# Altium PCB panel_led.PcbDoc (part 2 of 2)
Units mm, origin at the board's own origin, x right, y up, seen from the top; angles counter-clockwise.
Board outline 185.25 x 285.25 mm, 2 copper layers (Top Layer, Bottom Layer); 460 components, 231 nets, 1602 pads, 0 vias.
Unrouted connection lines stored in the file: 3.
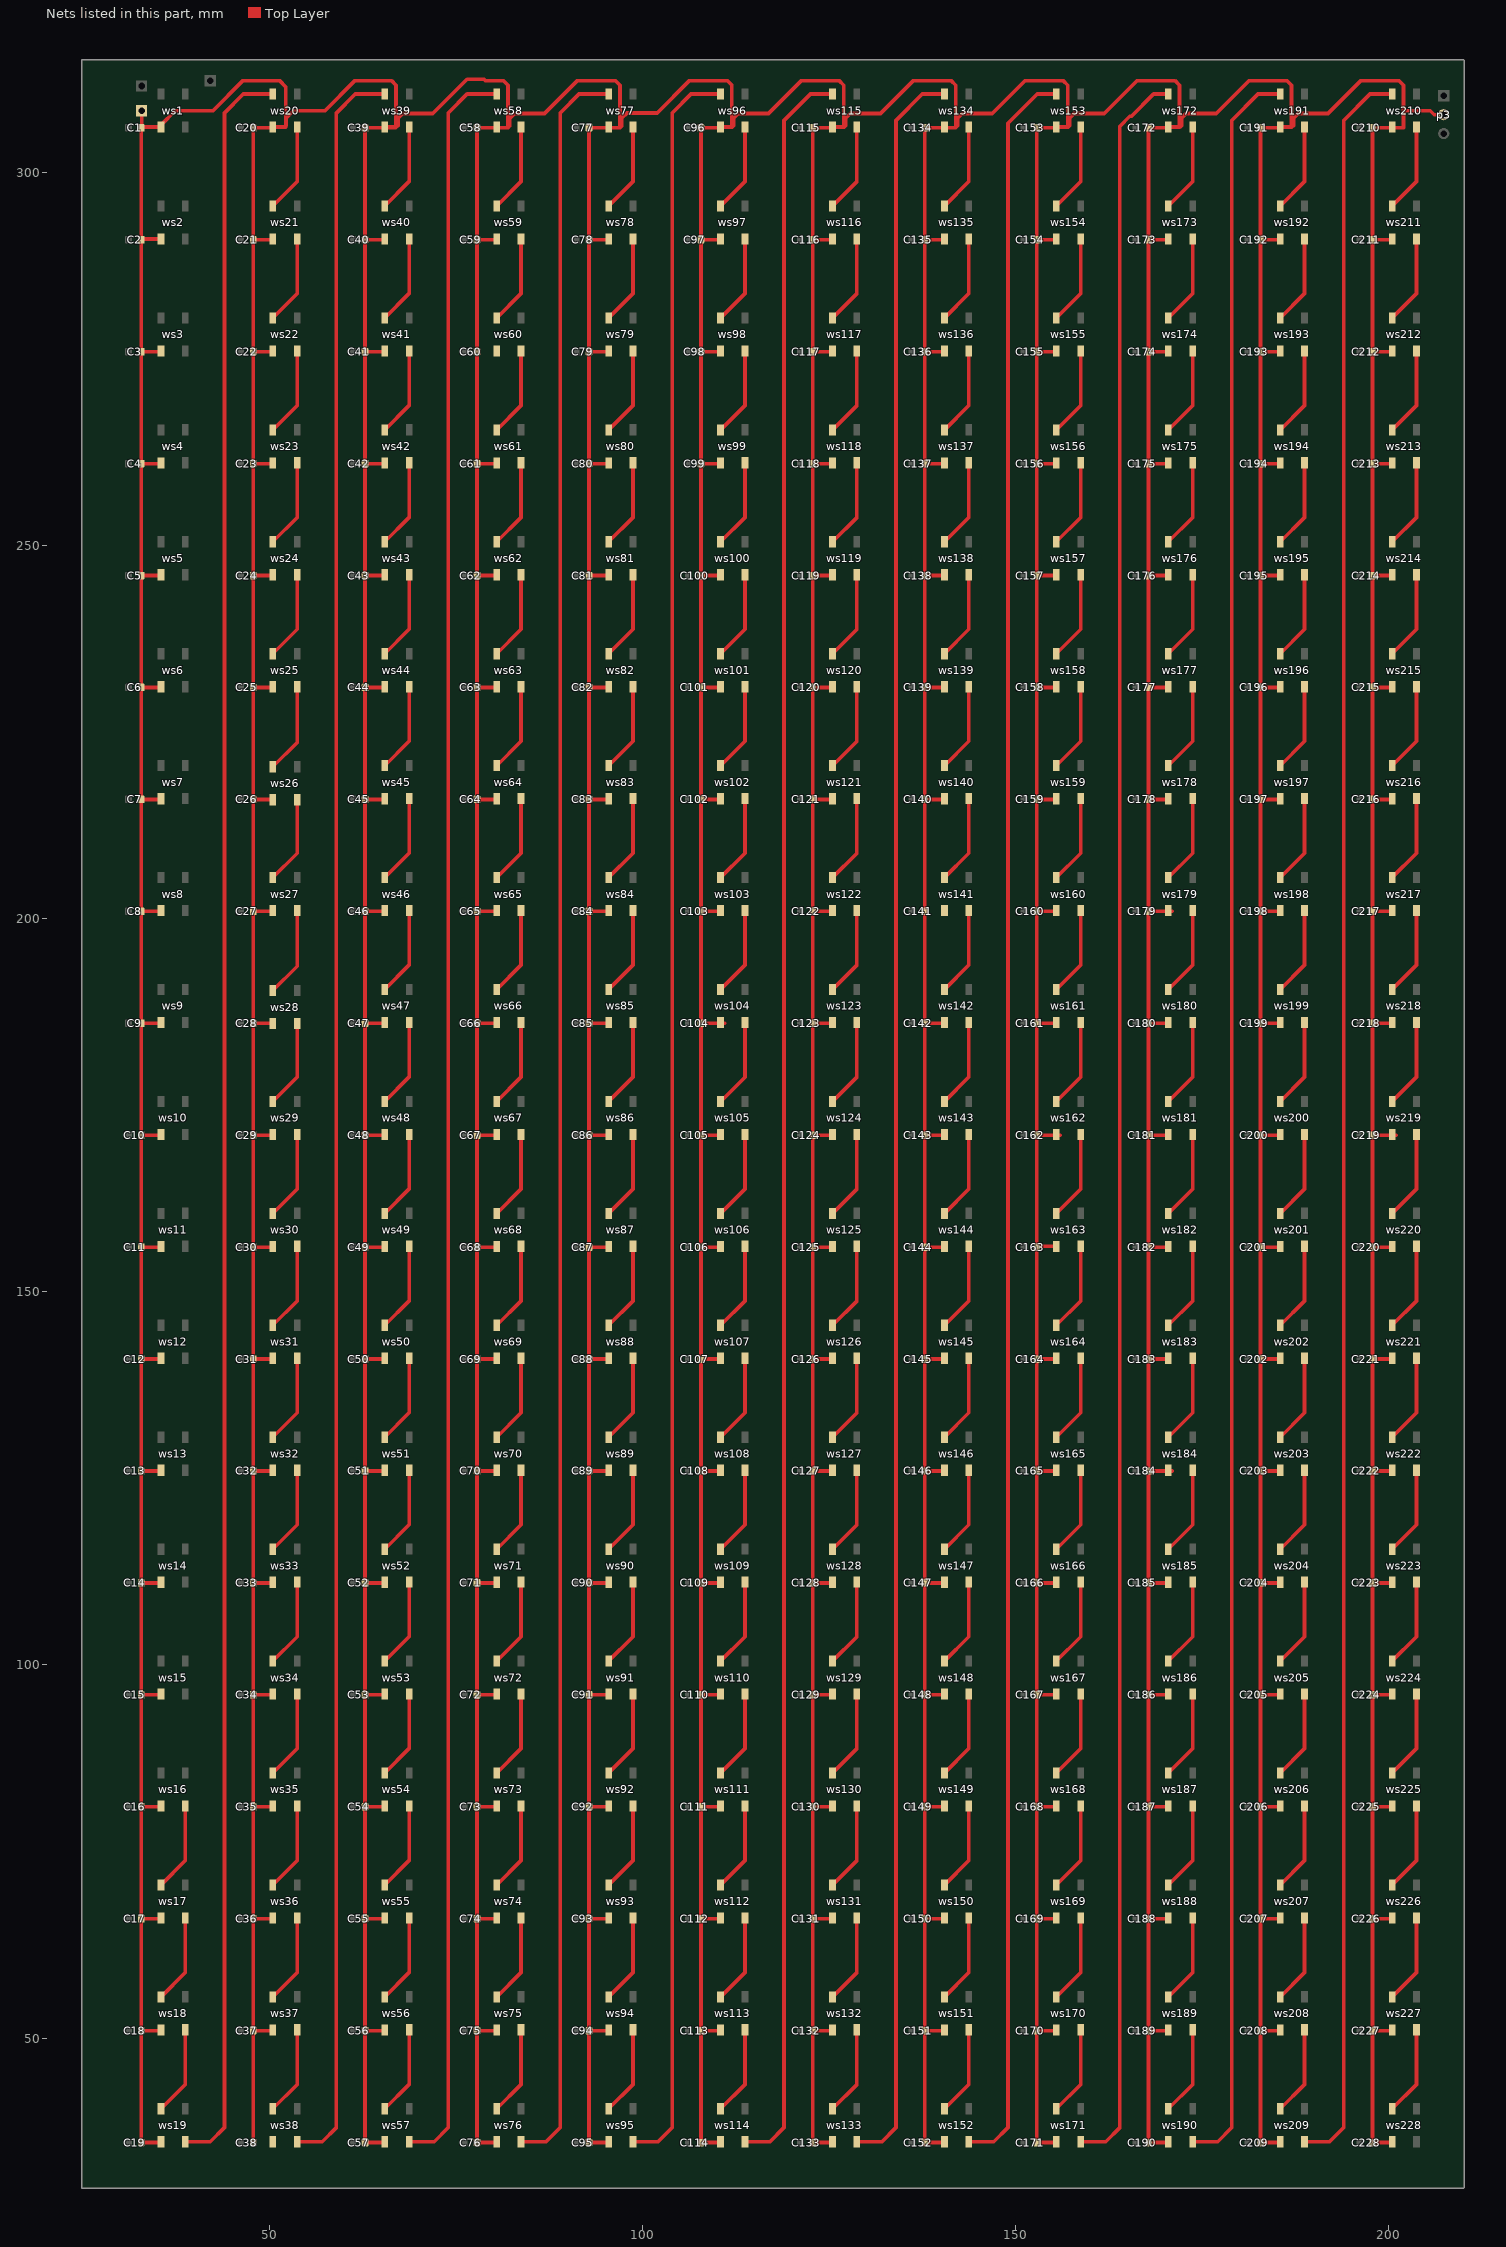
[diagram p2: the nets of this part, all layers, seen from the top]

## Nets (pads, with @x,y where several pads share a name; then routed paths per layer and width w, separated by ;. In a path a pad name is that pad's centre, name@x,y a point inside that pad or via, vN(x,y) a via of type N, cw(c..) or ccw(c..) an arc to the next point about the centre after c; other vN are vias at no path point) (continued)
Netws16_2: ws16.2 ws17.4 | length 11.9
  Top Layer w0.5: ws17.4@35.484,70.524 38.751,73.791 ws16.2@38.751,81.106
Netws17_2: ws17.2 ws18.4 | length 11.9
  Top Layer w0.5: ws18.4@35.484,55.524 38.751,58.791 ws17.2@38.751,66.106
Netws18_2: ws18.2 ws19.4 | length 11.9
  Top Layer w0.5: ws19.4@35.484,40.524 38.751,43.791 ws18.2@38.751,51.106
Netws19_2: ws19.2 ws20.4 | length 283.6
  Top Layer w0.5: ws19.2@38.751,36.106 42.106,36.106 44,38 44,308 46.524,310.524 ws20.4@50.484,310.524
Netws20_2: ws20.2 ws21.4 | length 11.9
  Top Layer w0.5: ws21.4@50.484,295.524 53.751,298.791 ws20.2@53.751,306.106
Netws21_2: ws21.2 ws22.4 | length 11.9
  Top Layer w0.5: ws22.4@50.484,280.524 53.751,283.791 ws21.2@53.751,291.106
Netws22_2: ws22.2 ws23.4 | length 11.9
  Top Layer w0.5: ws23.4@50.484,265.524 53.751,268.791 ws22.2@53.751,276.106
Netws23_2: ws23.2 ws24.4 | length 11.9
  Top Layer w0.5: ws24.4@50.484,250.524 53.751,253.791 ws23.2@53.751,261.106
Netws24_2: ws24.2 ws25.4 | length 11.9
  Top Layer w0.5: ws25.4@50.484,235.524 53.751,238.791 ws24.2@53.751,246.106
Netws25_2: ws25.2 ws26.4 | length 12.1
  Top Layer w0.5: ws26.4@50.484,220.374 53.751,223.641 ws25.2@53.751,231.106
Netws26_2: ws26.2 ws27.4 | length 11.8
  Top Layer w0.5: ws27.4@50.484,205.524 53.751,208.791 ws26.2@53.751,215.956
Netws27_2: ws27.2 ws28.4 | length 12.1
  Top Layer w0.5: ws28.4@50.484,190.374 53.751,193.641 ws27.2@53.751,201.106
Netws28_2: ws28.2 ws29.4 | length 11.8
  Top Layer w0.5: ws29.4@50.484,175.524 53.751,178.791 ws28.2@53.751,185.956
Netws29_2: ws29.2 ws30.4 | length 11.9
  Top Layer w0.5: ws30.4@50.484,160.524 53.751,163.791 ws29.2@53.751,171.106
Netws30_2: ws30.2 ws31.4 | length 11.9
  Top Layer w0.5: ws31.4@50.484,145.524 53.751,148.791 ws30.2@53.751,156.106
Netws31_2: ws31.2 ws32.4 | length 11.9
  Top Layer w0.5: ws32.4@50.484,130.524 53.751,133.791 ws31.2@53.751,141.106
Netws32_2: ws32.2 ws33.4 | length 11.9
  Top Layer w0.5: ws33.4@50.484,115.524 53.751,118.791 ws32.2@53.751,126.106
Netws33_2: ws33.2 ws34.4 | length 11.9
  Top Layer w0.5: ws34.4@50.484,100.524 53.751,103.791 ws33.2@53.751,111.106
Netws34_2: ws34.2 ws35.4 | length 11.9
  Top Layer w0.5: ws35.4@50.484,85.524 53.751,88.791 ws34.2@53.751,96.106
Netws35_2: ws35.2 ws36.4 | length 11.9
  Top Layer w0.5: ws36.4@50.484,70.524 53.751,73.791 ws35.2@53.751,81.106
Netws36_2: ws36.2 ws37.4 | length 11.9
  Top Layer w0.5: ws37.4@50.484,55.524 53.751,58.791 ws36.2@53.751,66.106
Netws37_2: ws37.2 ws38.4 | length 11.9
  Top Layer w0.5: ws38.4@50.484,40.524 53.751,43.791 ws37.2@53.751,51.106
Netws38_2: ws38.2 ws39.4 | length 283.6
  Top Layer w0.5: ws38.2@53.751,36.106 57.106,36.106 59,38 59,308 61.524,310.524 ws39.4@65.484,310.524
Netws39_2: ws39.2 ws40.4 | length 11.9
  Top Layer w0.5: ws40.4@65.484,295.524 68.751,298.791 ws39.2@68.751,306.106
Netws40_2: ws40.2 ws41.4 | length 11.9
  Top Layer w0.5: ws41.4@65.484,280.524 68.751,283.791 ws40.2@68.751,291.106
Netws41_2: ws41.2 ws42.4 | length 11.9
  Top Layer w0.5: ws42.4@65.484,265.524 68.751,268.791 ws41.2@68.751,276.106
Netws42_2: ws42.2 ws43.4 | length 11.9
  Top Layer w0.5: ws43.4@65.484,250.524 68.751,253.791 ws42.2@68.751,261.106
Netws43_2: ws43.2 ws44.4 | length 11.9
  Top Layer w0.5: ws44.4@65.484,235.524 68.751,238.791 ws43.2@68.751,246.106
Netws44_2: ws44.2 ws45.4 | length 11.9
  Top Layer w0.5: ws45.4@65.484,220.524 68.751,223.791 ws44.2@68.751,231.106
Netws45_2: ws45.2 ws46.4 | length 11.9
  Top Layer w0.5: ws46.4@65.484,205.524 68.751,208.791 ws45.2@68.751,216.106
Netws46_2: ws46.2 ws47.4 | length 11.9
  Top Layer w0.5: ws47.4@65.484,190.524 68.751,193.791 ws46.2@68.751,201.106
Netws47_2: ws47.2 ws48.4 | length 11.9
  Top Layer w0.5: ws48.4@65.484,175.524 68.751,178.791 ws47.2@68.751,186.106
Netws48_2: ws48.2 ws49.4 | length 11.9
  Top Layer w0.5: ws49.4@65.484,160.524 68.751,163.791 ws48.2@68.751,171.106
Netws49_2: ws49.2 ws50.4 | length 11.9
  Top Layer w0.5: ws50.4@65.484,145.524 68.751,148.791 ws49.2@68.751,156.106
Netws50_2: ws50.2 ws51.4 | length 11.9
  Top Layer w0.5: ws51.4@65.484,130.524 68.751,133.791 ws50.2@68.751,141.106
Netws51_2: ws51.2 ws52.4 | length 11.9
  Top Layer w0.5: ws52.4@65.484,115.524 68.751,118.791 ws51.2@68.751,126.106
Netws52_2: ws52.2 ws53.4 | length 11.9
  Top Layer w0.5: ws53.4@65.484,100.524 68.751,103.791 ws52.2@68.751,111.106
Netws53_2: ws53.2 ws54.4 | length 11.9
  Top Layer w0.5: ws54.4@65.484,85.524 68.751,88.791 ws53.2@68.751,96.106
Netws54_2: ws54.2 ws55.4 | length 11.9
  Top Layer w0.5: ws55.4@65.484,70.524 68.751,73.791 ws54.2@68.751,81.106
Netws55_2: ws55.2 ws56.4 | length 11.9
  Top Layer w0.5: ws56.4@65.484,55.524 68.751,58.791 ws55.2@68.751,66.106
Netws56_2: ws56.2 ws57.4 | length 11.9
  Top Layer w0.5: ws57.4@65.484,40.524 68.751,43.791 ws56.2@68.751,51.106
Netws57_2: ws57.2 ws58.4 | length 283.6
  Top Layer w0.5: ws57.2@68.751,36.106 72.106,36.106 74,38 74,308 76.524,310.524 ws58.4@80.484,310.524
Netws58_2: ws58.2 ws59.4 | length 11.9
  Top Layer w0.5: ws59.4@80.484,295.524 83.751,298.791 ws58.2@83.751,306.106
Netws59_2: ws59.2 ws60.4 | length 11.9
  Top Layer w0.5: ws60.4@80.484,280.524 83.751,283.791 ws59.2@83.751,291.106
Netws60_2: ws60.2 ws61.4 | length 11.9
  Top Layer w0.5: ws61.4@80.484,265.524 83.751,268.791 ws60.2@83.751,276.106
Netws61_2: ws61.2 ws62.4 | length 11.9
  Top Layer w0.5: ws62.4@80.484,250.524 83.751,253.791 ws61.2@83.751,261.106
Netws62_2: ws62.2 ws63.4 | length 11.9
  Top Layer w0.5: ws63.4@80.484,235.524 83.751,238.791 ws62.2@83.751,246.106
Netws63_2: ws63.2 ws64.4 | length 11.9
  Top Layer w0.5: ws64.4@80.484,220.524 83.751,223.791 ws63.2@83.751,231.106
Netws64_2: ws64.2 ws65.4 | length 11.9
  Top Layer w0.5: ws65.4@80.484,205.524 83.751,208.791 ws64.2@83.751,216.106
Netws65_2: ws65.2 ws66.4 | length 11.9
  Top Layer w0.5: ws66.4@80.484,190.524 83.751,193.791 ws65.2@83.751,201.106
Netws66_2: ws66.2 ws67.4 | length 11.9
  Top Layer w0.5: ws67.4@80.484,175.524 83.751,178.791 ws66.2@83.751,186.106
Netws67_2: ws67.2 ws68.4 | length 11.9
  Top Layer w0.5: ws68.4@80.484,160.524 83.751,163.791 ws67.2@83.751,171.106
Netws68_2: ws68.2 ws69.4 | length 11.9
  Top Layer w0.5: ws69.4@80.484,145.524 83.751,148.791 ws68.2@83.751,156.106
Netws69_2: ws69.2 ws70.4 | length 11.9
  Top Layer w0.5: ws70.4@80.484,130.524 83.751,133.791 ws69.2@83.751,141.106
Netws70_2: ws70.2 ws71.4 | length 11.9
  Top Layer w0.5: ws71.4@80.484,115.524 83.751,118.791 ws70.2@83.751,126.106
Netws71_2: ws71.2 ws72.4 | length 11.9
  Top Layer w0.5: ws72.4@80.484,100.524 83.751,103.791 ws71.2@83.751,111.106
Netws72_2: ws72.2 ws73.4 | length 11.9
  Top Layer w0.5: ws73.4@80.484,85.524 83.751,88.791 ws72.2@83.751,96.106
Netws73_2: ws73.2 ws74.4 | length 11.9
  Top Layer w0.5: ws74.4@80.484,70.524 83.751,73.791 ws73.2@83.751,81.106
Netws74_2: ws74.2 ws75.4 | length 11.9
  Top Layer w0.5: ws75.4@80.484,55.524 83.751,58.791 ws74.2@83.751,66.106
Netws75_2: ws75.2 ws76.4 | length 11.9
  Top Layer w0.5: ws76.4@80.484,40.524 83.751,43.791 ws75.2@83.751,51.106
Netws76_2: ws76.2 ws77.4 | length 283.6
  Top Layer w0.5: ws76.2@83.751,36.106 87.106,36.106 89,38 89,308 91.524,310.524 ws77.4@95.484,310.524
Netws77_2: ws77.2 ws78.4 | length 11.9
  Top Layer w0.5: ws78.4@95.484,295.524 98.751,298.791 ws77.2@98.751,306.106
Netws78_2: ws78.2 ws79.4 | length 11.9
  Top Layer w0.5: ws79.4@95.484,280.524 98.751,283.791 ws78.2@98.751,291.106
Netws79_2: ws79.2 ws80.4 | length 11.9
  Top Layer w0.5: ws80.4@95.484,265.524 98.751,268.791 ws79.2@98.751,276.106
Netws80_2: ws80.2 ws81.4 | length 11.9
  Top Layer w0.5: ws81.4@95.484,250.524 98.751,253.791 ws80.2@98.751,261.106
Netws81_2: ws81.2 ws82.4 | length 11.9
  Top Layer w0.5: ws82.4@95.484,235.524 98.751,238.791 ws81.2@98.751,246.106
Netws82_2: ws82.2 ws83.4 | length 11.9
  Top Layer w0.5: ws83.4@95.484,220.524 98.751,223.791 ws82.2@98.751,231.106
Netws83_2: ws83.2 ws84.4 | length 11.9
  Top Layer w0.5: ws84.4@95.484,205.524 98.751,208.791 ws83.2@98.751,216.106
Netws84_2: ws84.2 ws85.4 | length 11.9
  Top Layer w0.5: ws85.4@95.484,190.524 98.751,193.791 ws84.2@98.751,201.106
Netws85_2: ws85.2 ws86.4 | length 11.9
  Top Layer w0.5: ws86.4@95.484,175.524 98.751,178.791 ws85.2@98.751,186.106
Netws86_2: ws86.2 ws87.4 | length 11.9
  Top Layer w0.5: ws87.4@95.484,160.524 98.751,163.791 ws86.2@98.751,171.106
Netws87_2: ws87.2 ws88.4 | length 11.9
  Top Layer w0.5: ws88.4@95.484,145.524 98.751,148.791 ws87.2@98.751,156.106
Netws88_2: ws88.2 ws89.4 | length 11.9
  Top Layer w0.5: ws89.4@95.484,130.524 98.751,133.791 ws88.2@98.751,141.106
Netws89_2: ws89.2 ws90.4 | length 11.9
  Top Layer w0.5: ws90.4@95.484,115.524 98.751,118.791 ws89.2@98.751,126.106
Netws90_2: ws90.2 ws91.4 | length 11.9
  Top Layer w0.5: ws91.4@95.484,100.524 98.751,103.791 ws90.2@98.751,111.106
Netws91_2: ws91.2 ws92.4 | length 11.9
  Top Layer w0.5: ws92.4@95.484,85.524 98.751,88.791 ws91.2@98.751,96.106
Netws92_2: ws92.2 ws93.4 | length 11.9
  Top Layer w0.5: ws93.4@95.484,70.524 98.751,73.791 ws92.2@98.751,81.106
Netws93_2: ws93.2 ws94.4 | length 11.9
  Top Layer w0.5: ws94.4@95.484,55.524 98.751,58.791 ws93.2@98.751,66.106
Netws94_2: ws94.2 ws95.4 | length 11.9
  Top Layer w0.5: ws95.4@95.484,40.524 98.751,43.791 ws94.2@98.751,51.106
Netws95_2: ws95.2 ws96.4 | length 283.6
  Top Layer w0.5: ws95.2@98.751,36.106 102.106,36.106 104,38 104,308 106.524,310.524 ws96.4@110.484,310.524
Netws96_2: ws96.2 ws97.4 | length 11.9
  Top Layer w0.5: ws97.4@110.484,295.524 113.751,298.791 ws96.2@113.751,306.106
Netws97_2: ws97.2 ws98.4 | length 11.9
  Top Layer w0.5: ws98.4@110.484,280.524 113.751,283.791 ws97.2@113.751,291.106
Netws98_2: ws98.2 ws99.4 | length 11.9
  Top Layer w0.5: ws99.4@110.484,265.524 113.751,268.791 ws98.2@113.751,276.106
Netws99_2: ws99.2 ws100.4 | length 11.9
  Top Layer w0.5: ws100.4@110.484,250.524 113.751,253.791 ws99.2@113.751,261.106
Netws100_2: ws100.2 ws101.4 | length 11.9
  Top Layer w0.5: ws101.4@110.484,235.524 113.751,238.791 ws100.2@113.751,246.106
Netws101_2: ws101.2 ws102.4 | length 11.9
  Top Layer w0.5: ws102.4@110.484,220.524 113.751,223.791 ws101.2@113.751,231.106
Netws102_2: ws102.2 ws103.4 | length 11.9
  Top Layer w0.5: ws103.4@110.484,205.524 113.751,208.791 ws102.2@113.751,216.106
Netws103_2: ws103.2 ws104.4 | length 11.9
  Top Layer w0.5: ws104.4@110.484,190.524 113.751,193.791 ws103.2@113.751,201.106
Netws104_2: ws104.2 ws105.4 | length 11.9
  Top Layer w0.5: ws105.4@110.524,175.524 113.751,178.751 ws104.2@113.751,186.106
Netws105_2: ws105.2 ws106.4 | length 11.9
  Top Layer w0.5: ws106.4@110.484,160.524 113.751,163.791 ws105.2@113.751,171.106
Netws106_2: ws106.2 ws107.4 | length 11.9
  Top Layer w0.5: ws107.4@110.484,145.524 113.751,148.791 ws106.2@113.751,156.106
Netws107_2: ws107.2 ws108.4 | length 11.9
  Top Layer w0.5: ws108.4@110.484,130.524 113.751,133.791 ws107.2@113.751,141.106
Netws108_2: ws108.2 ws109.4 | length 11.9
  Top Layer w0.5: ws109.4@110.484,115.524 113.751,118.791 ws108.2@113.751,126.106
Netws109_2: ws109.2 ws110.4 | length 11.9
  Top Layer w0.5: ws110.4@110.484,100.524 113.751,103.791 ws109.2@113.751,111.106
Netws110_2: ws110.2 ws111.4 | length 11.9
  Top Layer w0.5: ws111.4@110.484,85.524 113.751,88.791 ws110.2@113.751,96.106
Netws111_2: ws111.2 ws112.4 | length 11.9
  Top Layer w0.5: ws112.4@110.484,70.524 113.751,73.791 ws111.2@113.751,81.106
Netws112_2: ws112.2 ws113.4 | length 11.9
  Top Layer w0.5: ws113.4@110.484,55.524 113.751,58.791 ws112.2@113.751,66.106
Netws113_2: ws113.2 ws114.4 | length 11.9
  Top Layer w0.5: ws114.4@110.484,40.524 113.751,43.791 ws113.2@113.751,51.106
Netws114_2: ws114.2 ws115.4 | length 283
  Top Layer w0.5: ws114.2@113.751,36.106 117.106,36.106 119,38 119,307 122.524,310.524 ws115.4@125.484,310.524
Netws115_2: ws115.2 ws116.4 | length 11.9
  Top Layer w0.5: ws116.4@125.484,295.524 128.751,298.791 ws115.2@128.751,306.106
Netws116_2: ws116.2 ws117.4 | length 11.9
  Top Layer w0.5: ws117.4@125.484,280.524 128.751,283.791 ws116.2@128.751,291.106
Netws117_2: ws117.2 ws118.4 | length 11.9
  Top Layer w0.5: ws118.4@125.484,265.524 128.751,268.791 ws117.2@128.751,276.106
Netws118_2: ws118.2 ws119.4 | length 11.9
  Top Layer w0.5: ws119.4@125.484,250.524 128.751,253.791 ws118.2@128.751,261.106
Netws119_2: ws119.2 ws120.4 | length 11.9
  Top Layer w0.5: ws120.4@125.484,235.524 128.751,238.791 ws119.2@128.751,246.106
Netws120_2: ws120.2 ws121.4 | length 11.9
  Top Layer w0.5: ws121.4@125.484,220.524 128.751,223.791 ws120.2@128.751,231.106
Netws121_2: ws121.2 ws122.4 | length 11.9
  Top Layer w0.5: ws122.4@125.484,205.524 128.751,208.791 ws121.2@128.751,216.106
Netws122_2: ws122.2 ws123.4 | length 11.9
  Top Layer w0.5: ws123.4@125.484,190.524 128.751,193.791 ws122.2@128.751,201.106
Netws123_2: ws123.2 ws124.4 | length 11.9
  Top Layer w0.5: ws124.4@125.484,175.524 128.751,178.791 ws123.2@128.751,186.106
Netws124_2: ws124.2 ws125.4 | length 11.9
  Top Layer w0.5: ws125.4@125.484,160.524 128.751,163.791 ws124.2@128.751,171.106
Netws125_2: ws125.2 ws126.4 | length 11.9
  Top Layer w0.5: ws126.4@125.484,145.524 128.751,148.791 ws125.2@128.751,156.106
Netws126_2: ws126.2 ws127.4 | length 11.9
  Top Layer w0.5: ws127.4@125.484,130.524 128.751,133.791 ws126.2@128.751,141.106
Netws127_2: ws127.2 ws128.4 | length 11.9
  Top Layer w0.5: ws128.4@125.484,115.524 128.751,118.791 ws127.2@128.751,126.106
Netws128_2: ws128.2 ws129.4 | length 11.9
  Top Layer w0.5: ws129.4@125.484,100.524 128.751,103.791 ws128.2@128.751,111.106
Netws129_2: ws129.2 ws130.4 | length 11.9
  Top Layer w0.5: ws130.4@125.484,85.524 128.751,88.791 ws129.2@128.751,96.106
Netws130_2: ws130.2 ws131.4 | length 11.9
  Top Layer w0.5: ws131.4@125.484,70.524 128.751,73.791 ws130.2@128.751,81.106
Netws131_2: ws131.2 ws132.4 | length 11.9
  Top Layer w0.5: ws132.4@125.484,55.524 128.751,58.791 ws131.2@128.751,66.106
Netws132_2: ws132.2 ws133.4 | length 11.9
  Top Layer w0.5: ws133.4@125.484,40.524 128.751,43.791 ws132.2@128.751,51.106
Netws133_2: ws133.2 ws134.4 | length 283
  Top Layer w0.5: ws133.2@128.751,36.106 132.106,36.106 134,38 134,307 137.524,310.524 ws134.4@140.484,310.524
Netws134_2: ws134.2 ws135.4 | length 11.9
  Top Layer w0.5: ws135.4@140.484,295.524 143.751,298.791 ws134.2@143.751,306.106
Netws135_2: ws135.2 ws136.4 | length 11.9
  Top Layer w0.5: ws136.4@140.484,280.524 143.751,283.791 ws135.2@143.751,291.106
Netws136_2: ws136.2 ws137.4 | length 11.9
  Top Layer w0.5: ws137.4@140.484,265.524 143.751,268.791 ws136.2@143.751,276.106
Netws137_2: ws137.2 ws138.4 | length 11.9
  Top Layer w0.5: ws138.4@140.484,250.524 143.751,253.791 ws137.2@143.751,261.106
Netws138_2: ws138.2 ws139.4 | length 11.9
  Top Layer w0.5: ws139.4@140.484,235.524 143.751,238.791 ws138.2@143.751,246.106
Netws139_2: ws139.2 ws140.4 | length 11.9
  Top Layer w0.5: ws140.4@140.484,220.524 143.751,223.791 ws139.2@143.751,231.106
Netws140_2: ws140.2 ws141.4 | length 11.9
  Top Layer w0.5: ws141.4@140.484,205.524 143.751,208.791 ws140.2@143.751,216.106
Netws141_2: ws141.2 ws142.4 | length 11.9
  Top Layer w0.5: ws142.4@140.484,190.524 143.751,193.791 ws141.2@143.751,201.106
Netws142_2: ws142.2 ws143.4 | length 11.9
  Top Layer w0.5: ws143.4@140.484,175.524 143.751,178.791 ws142.2@143.751,186.106
Netws143_2: ws143.2 ws144.4 | length 11.9
  Top Layer w0.5: ws144.4@140.484,160.524 143.751,163.791 ws143.2@143.751,171.106
Netws144_2: ws144.2 ws145.4 | length 11.9
  Top Layer w0.5: ws145.4@140.484,145.524 143.751,148.791 ws144.2@143.751,156.106
Netws145_2: ws145.2 ws146.4 | length 11.9
  Top Layer w0.5: ws146.4@140.484,130.524 143.751,133.791 ws145.2@143.751,141.106
Netws146_2: ws146.2 ws147.4 | length 11.9
  Top Layer w0.5: ws147.4@140.484,115.524 143.751,118.791 ws146.2@143.751,126.106
Netws147_2: ws147.2 ws148.4 | length 11.9
  Top Layer w0.5: ws148.4@140.484,100.524 143.751,103.791 ws147.2@143.751,111.106
Netws148_2: ws148.2 ws149.4 | length 11.9
  Top Layer w0.5: ws149.4@140.484,85.524 143.751,88.791 ws148.2@143.751,96.106
Netws149_2: ws149.2 ws150.4 | length 11.9
  Top Layer w0.5: ws150.4@140.484,70.524 143.751,73.791 ws149.2@143.751,81.106
Netws150_2: ws150.2 ws151.4 | length 11.9
  Top Layer w0.5: ws151.4@140.484,55.524 143.751,58.791 ws150.2@143.751,66.106
Netws151_2: ws151.2 ws152.4 | length 11.9
  Top Layer w0.5: ws152.4@140.484,40.524 143.751,43.791 ws151.2@143.751,51.106
Netws152_2: ws152.2 ws153.4 | length 282.7
  Top Layer w0.5: ws152.2@143.751,36.106 147.106,36.106 149,38 149,306.606 152.917,310.524 ws153.4@155.484,310.524
Netws153_2: ws153.2 ws154.4 | length 11.9
  Top Layer w0.5: ws154.4@155.484,295.524 158.751,298.791 ws153.2@158.751,306.106
Netws154_2: ws154.2 ws155.4 | length 11.9
  Top Layer w0.5: ws155.4@155.484,280.524 158.751,283.791 ws154.2@158.751,291.106
Netws155_2: ws155.2 ws156.4 | length 11.9
  Top Layer w0.5: ws156.4@155.484,265.524 158.751,268.791 ws155.2@158.751,276.106
Netws156_2: ws156.2 ws157.4 | length 11.9
  Top Layer w0.5: ws157.4@155.484,250.524 158.751,253.791 ws156.2@158.751,261.106
Netws157_2: ws157.2 ws158.4 | length 11.9
  Top Layer w0.5: ws158.4@155.484,235.524 158.751,238.791 ws157.2@158.751,246.106
Netws158_2: ws158.2 ws159.4 | length 11.9
  Top Layer w0.5: ws159.4@155.484,220.524 158.751,223.791 ws158.2@158.751,231.106
Netws159_2: ws159.2 ws160.4 | length 11.9
  Top Layer w0.5: ws160.4@155.484,205.524 158.751,208.791 ws159.2@158.751,216.106
Netws160_2: ws160.2 ws161.4 | length 11.9
  Top Layer w0.5: ws161.4@155.484,190.524 158.751,193.791 ws160.2@158.751,201.106
Netws161_2: ws161.2 ws162.4 | length 11.9
  Top Layer w0.5: ws162.4@155.484,175.524 158.751,178.791 ws161.2@158.751,186.106
Netws162_2: ws162.2 ws163.4 | length 11.9
  Top Layer w0.5: ws163.4@155.484,160.524 158.751,163.791 ws162.2@158.751,171.106
Netws163_2: ws163.2 ws164.4 | length 11.9
  Top Layer w0.5: ws164.4@155.484,145.524 158.751,148.791 ws163.2@158.751,156.106
Netws164_2: ws164.2 ws165.4 | length 11.9
  Top Layer w0.5: ws165.4@155.484,130.524 158.751,133.791 ws164.2@158.751,141.106
Netws165_2: ws165.2 ws166.4 | length 11.9
  Top Layer w0.5: ws166.4@155.484,115.524 158.751,118.791 ws165.2@158.751,126.106
Netws166_2: ws166.2 ws167.4 | length 11.9
  Top Layer w0.5: ws167.4@155.484,100.524 158.751,103.791 ws166.2@158.751,111.106
Netws167_2: ws167.2 ws168.4 | length 11.9
  Top Layer w0.5: ws168.4@155.484,85.524 158.751,88.791 ws167.2@158.751,96.106
Netws168_2: ws168.2 ws169.4 | length 11.9
  Top Layer w0.5: ws169.4@155.484,70.524 158.751,73.791 ws168.2@158.751,81.106
Netws169_2: ws169.2 ws170.4 | length 11.9
  Top Layer w0.5: ws170.4@155.484,55.524 158.751,58.791 ws169.2@158.751,66.106
Netws170_2: ws170.2 ws171.4 | length 11.9
  Top Layer w0.5: ws171.4@155.484,40.524 158.751,43.791 ws170.2@158.751,51.106
Netws171_2: ws171.2 ws172.4 | length 282.5
  Top Layer w0.5: ws171.2@158.751,36.106 162.106,36.106 164,38 164,306.219 165.331,307.55 165.55,307.55 168.524,310.524 ws172.4@170.484,310.524
Netws172_2: ws172.2 ws173.4 | length 11.9
  Top Layer w0.5: ws173.4@170.484,295.524 173.751,298.791 ws172.2@173.751,306.106
Netws173_2: ws173.2 ws174.4 | length 11.9
  Top Layer w0.5: ws174.4@170.484,280.524 173.751,283.791 ws173.2@173.751,291.106
Netws174_2: ws174.2 ws175.4 | length 11.9
  Top Layer w0.5: ws175.4@170.484,265.524 173.751,268.791 ws174.2@173.751,276.106
Netws175_2: ws175.2 ws176.4 | length 11.9
  Top Layer w0.5: ws176.4@170.484,250.524 173.751,253.791 ws175.2@173.751,261.106
Netws176_2: ws176.2 ws177.4 | length 11.9
  Top Layer w0.5: ws177.4@170.484,235.524 173.751,238.791 ws176.2@173.751,246.106
Netws177_2: ws177.2 ws178.4 | length 11.9
  Top Layer w0.5: ws178.4@170.484,220.524 173.751,223.791 ws177.2@173.751,231.106
Netws178_2: ws178.2 ws179.4 | length 11.9
  Top Layer w0.5: ws179.4@170.484,205.524 173.751,208.791 ws178.2@173.751,216.106
Netws179_2: ws179.2 ws180.4 | length 11.9
  Top Layer w0.5: ws180.4@170.484,190.524 173.751,193.791 ws179.2@173.751,201.106
Netws180_2: ws180.2 ws181.4 | length 11.9
  Top Layer w0.5: ws181.4@170.484,175.524 173.751,178.791 ws180.2@173.751,186.106
Netws181_2: ws181.2 ws182.4 | length 11.9
  Top Layer w0.5: ws182.4@170.484,160.524 173.751,163.791 ws181.2@173.751,171.106
Netws182_2: ws182.2 ws183.4 | length 11.9
  Top Layer w0.5: ws183.4@170.484,145.524 173.751,148.791 ws182.2@173.751,156.106
Netws183_2: ws183.2 ws184.4 | length 11.9
  Top Layer w0.5: ws184.4@170.484,130.524 173.751,133.791 ws183.2@173.751,141.106
Netws184_2: ws184.2 ws185.4 | length 11.9
  Top Layer w0.5: ws185.4@170.484,115.524 173.751,118.791 ws184.2@173.751,126.106
Netws185_2: ws185.2 ws186.4 | length 11.9
  Top Layer w0.5: ws186.4@170.484,100.524 173.751,103.791 ws185.2@173.751,111.106
Netws186_2: ws186.2 ws187.4 | length 11.9
  Top Layer w0.5: ws187.4@170.484,85.524 173.751,88.791 ws186.2@173.751,96.106
Netws187_2: ws187.2 ws188.4 | length 11.9
  Top Layer w0.5: ws188.4@170.484,70.524 173.751,73.791 ws187.2@173.751,81.106
Netws188_2: ws188.2 ws189.4 | length 11.9
  Top Layer w0.5: ws189.4@170.484,55.524 173.751,58.791 ws188.2@173.751,66.106
Netws189_2: ws189.2 ws190.4 | length 11.9
  Top Layer w0.5: ws190.4@170.484,40.524 173.751,43.791 ws189.2@173.751,51.106
Netws190_2: ws190.2 ws191.4 | length 283
  Top Layer w0.5: ws190.2@173.751,36.106 177.106,36.106 179,38 179,307 182.524,310.524 ws191.4@185.484,310.524
Netws191_2: ws191.2 ws192.4 | length 11.9
  Top Layer w0.5: ws192.4@185.484,295.524 188.751,298.791 ws191.2@188.751,306.106
Netws192_2: ws192.2 ws193.4 | length 11.9
  Top Layer w0.5: ws193.4@185.484,280.524 188.751,283.791 ws192.2@188.751,291.106
Netws193_2: ws193.2 ws194.4 | length 11.9
  Top Layer w0.5: ws194.4@185.484,265.524 188.751,268.791 ws193.2@188.751,276.106
Netws194_2: ws194.2 ws195.4 | length 11.9
  Top Layer w0.5: ws195.4@185.484,250.524 188.751,253.791 ws194.2@188.751,261.106
Netws195_2: ws195.2 ws196.4 | length 11.9
  Top Layer w0.5: ws196.4@185.484,235.524 188.751,238.791 ws195.2@188.751,246.106
Netws196_2: ws196.2 ws197.4 | length 11.9
  Top Layer w0.5: ws197.4@185.484,220.524 188.751,223.791 ws196.2@188.751,231.106
Netws197_2: ws197.2 ws198.4 | length 11.9
  Top Layer w0.5: ws198.4@185.484,205.524 188.751,208.791 ws197.2@188.751,216.106
Netws198_2: ws198.2 ws199.4 | length 11.9
  Top Layer w0.5: ws199.4@185.484,190.524 188.751,193.791 ws198.2@188.751,201.106
Netws199_2: ws199.2 ws200.4 | length 11.9
  Top Layer w0.5: ws200.4@185.484,175.524 188.751,178.791 ws199.2@188.751,186.106
Netws200_2: ws200.2 ws201.4 | length 11.9
  Top Layer w0.5: ws201.4@185.484,160.524 188.751,163.791 ws200.2@188.751,171.106
Netws201_2: ws201.2 ws202.4 | length 11.9
  Top Layer w0.5: ws202.4@185.484,145.524 188.751,148.791 ws201.2@188.751,156.106
Netws202_2: ws202.2 ws203.4 | length 11.9
  Top Layer w0.5: ws203.4@185.484,130.524 188.751,133.791 ws202.2@188.751,141.106
Netws203_2: ws203.2 ws204.4 | length 11.9
  Top Layer w0.5: ws204.4@185.484,115.524 188.751,118.791 ws203.2@188.751,126.106
Netws204_2: ws204.2 ws205.4 | length 11.9
  Top Layer w0.5: ws205.4@185.484,100.524 188.751,103.791 ws204.2@188.751,111.106
Netws205_2: ws205.2 ws206.4 | length 11.9
  Top Layer w0.5: ws206.4@185.484,85.524 188.751,88.791 ws205.2@188.751,96.106
Netws206_2: ws206.2 ws207.4 | length 11.9
  Top Layer w0.5: ws207.4@185.484,70.524 188.751,73.791 ws206.2@188.751,81.106
Netws207_2: ws207.2 ws208.4 | length 11.9
  Top Layer w0.5: ws208.4@185.484,55.524 188.751,58.791 ws207.2@188.751,66.106
Netws208_2: ws208.2 ws209.4 | length 11.9
  Top Layer w0.5: ws209.4@185.484,40.524 188.751,43.791 ws208.2@188.751,51.106
Netws209_2: ws209.2 ws210.4 | length 283
  Top Layer w0.5: ws209.2@188.751,36.106 192.106,36.106 194,38 194,307 197.524,310.524 ws210.4@200.484,310.524
Netws210_2: ws210.2 ws211.4 | length 11.9
  Top Layer w0.5: ws211.4@200.484,295.524 203.751,298.791 ws210.2@203.751,306.106
Netws211_2: ws211.2 ws212.4 | length 11.9
  Top Layer w0.5: ws212.4@200.484,280.524 203.751,283.791 ws211.2@203.751,291.106
Netws212_2: ws212.2 ws213.4 | length 11.9
  Top Layer w0.5: ws213.4@200.484,265.524 203.751,268.791 ws212.2@203.751,276.106
Netws213_2: ws213.2 ws214.4 | length 11.9
  Top Layer w0.5: ws214.4@200.484,250.524 203.751,253.791 ws213.2@203.751,261.106
Netws214_2: ws214.2 ws215.4 | length 11.9
  Top Layer w0.5: ws215.4@200.484,235.524 203.751,238.791 ws214.2@203.751,246.106
Netws215_2: ws215.2 ws216.4 | length 11.9
  Top Layer w0.5: ws216.4@200.484,220.524 203.751,223.791 ws215.2@203.751,231.106
Netws216_2: ws216.2 ws217.4 | length 11.9
  Top Layer w0.5: ws217.4@200.484,205.524 203.751,208.791 ws216.2@203.751,216.106
Netws217_2: ws217.2 ws218.4 | length 11.9
  Top Layer w0.5: ws218.4@200.484,190.524 203.751,193.791 ws217.2@203.751,201.106
Netws218_2: ws218.2 ws219.4 | length 11.9
  Top Layer w0.5: ws219.4@200.484,175.524 203.751,178.791 ws218.2@203.751,186.106
Netws219_2: ws219.2 ws220.4 | length 11.9
  Top Layer w0.5: ws220.4@200.484,160.524 203.751,163.791 ws219.2@203.751,171.106
Netws220_2: ws220.2 ws221.4 | length 11.9
  Top Layer w0.5: ws221.4@200.484,145.524 203.751,148.791 ws220.2@203.751,156.106
Netws221_2: ws221.2 ws222.4 | length 11.9
  Top Layer w0.5: ws222.4@200.484,130.524 203.751,133.791 ws221.2@203.751,141.106
Netws222_2: ws222.2 ws223.4 | length 11.9
  Top Layer w0.5: ws223.4@200.484,115.524 203.751,118.791 ws222.2@203.751,126.106
Netws223_2: ws223.2 ws224.4 | length 11.9
  Top Layer w0.5: ws224.4@200.484,100.524 203.751,103.791 ws223.2@203.751,111.106
Netws224_2: ws224.2 ws225.4 | length 11.9
  Top Layer w0.5: ws225.4@200.484,85.524 203.751,88.791 ws224.2@203.751,96.106
Netws225_2: ws225.2 ws226.4 | length 11.9
  Top Layer w0.5: ws226.4@200.484,70.524 203.751,73.791 ws225.2@203.751,81.106
Netws226_2: ws226.2 ws227.4 | length 11.9
  Top Layer w0.5: ws227.4@200.484,55.524 203.751,58.791 ws226.2@203.751,66.106
Netws227_2: ws227.2 ws228.4 | length 11.9
  Top Layer w0.5: ws228.4@200.484,40.524 203.751,43.791 ws227.2@203.751,51.106
VCC: C1.1 C2.1 C3.1 C4.1 C5.1 C6.1 C7.1 C8.1 C9.1 C10.1 C11.1 C12.1 C13.1 C14.1 C15.1 C16.1 C17.1 C18.1 C19.1 C20.1 C21.1 C22.1 C23.1 C24.1 C25.1 C26.1 C27.1 C28.1 C29.1 C30.1 C31.1 C32.1 C33.1 C34.1 C35.1 C36.1 C37.1 C38.1 C39.1 C40.1 C41.1 C42.1 C43.1 C44.1 C45.1 C46.1 C47.1 C48.1 C49.1 C50.1 C51.1 C52.1 C53.1 C54.1 C55.1 C56.1 C57.1 C58.1 C59.1 C60.1 C61.1 C62.1 C63.1 C64.1 C65.1 C66.1 C67.1 C68.1 C69.1 C70.1 C71.1 C72.1 C73.1 C74.1 C75.1 C76.1 C77.1 C78.1 C79.1 C80.1 C81.1 C82.1 C83.1 C84.1 C85.1 C86.1 C87.1 C88.1 C89.1 C90.1 C91.1 C92.1 C93.1 C94.1 C95.1 C96.1 C97.1 C98.1 C99.1 C100.1 C101.1 C102.1 C103.1 C104.1 C105.1 C106.1 C107.1 C108.1 C109.1 C110.1 C111.1 C112.1 C113.1 C114.1 C115.1 C116.1 C117.1 C118.1 C119.1 C120.1 C121.1 C122.1 C123.1 C124.1 C125.1 C126.1 C127.1 C128.1 C129.1 C130.1 C131.1 C132.1 C133.1 C134.1 C135.1 C136.1 C137.1 C138.1 C139.1 C140.1 C141.1 C142.1 C143.1 C144.1 C145.1 C146.1 C147.1 C148.1 C149.1 C150.1 C151.1 C152.1 C153.1 C154.1 C155.1 C156.1 C157.1 C158.1 C159.1 C160.1 C161.1 C162.1 C163.1 C164.1 C165.1 C166.1 C167.1 C168.1 C169.1 C170.1 C171.1 C172.1 C173.1 C174.1 C175.1 C176.1 C177.1 C178.1 C179.1 C180.1 C181.1 C182.1 C183.1 C184.1 C185.1 C186.1 C187.1 C188.1 C189.1 C190.1 C191.1 C192.1 C193.1 C194.1 C195.1 C196.1 C197.1 C198.1 C199.1 C200.1 C201.1 C202.1 C203.1 C204.1 C205.1 C206.1 C207.1 C208.1 C209.1 C210.1 C211.1 C212.1 C213.1 C214.1 C215.1 C216.1 C217.1 C218.1 C219.1 C220.1 C221.1 C222.1 C223.1 C224.1 C225.1 C226.1 C227.1 C228.1 p1.1 p3.2 ws1.1 ws2.1 ws3.1 ws4.1 ws5.1 ws6.1 ws7.1 ws8.1 ws9.1 ws10.1 ws11.1 ws12.1 ws13.1 ws14.1 ws15.1 ws16.1 ws17.1 ws18.1 ws19.1 ws20.1 ws21.1 ws22.1 ws23.1 ws24.1 ws25.1 ws26.1 ws27.1 ws28.1 ws29.1 ws30.1 ws31.1 ws32.1 ws33.1 ws34.1 ws35.1 ws36.1 ws37.1 ws38.1 ws39.1 ws40.1 ws41.1 ws42.1 ws43.1 ws44.1 ws45.1 ws46.1 ws47.1 ws48.1 ws49.1 ws50.1 ws51.1 ws52.1 ws53.1 ws54.1 ws55.1 ws56.1 ws57.1 ws58.1 ws59.1 ws60.1 ws61.1 ws62.1 ws63.1 ws64.1 ws65.1 ws66.1 ws67.1 ws68.1 ws69.1 ws70.1 ws71.1 ws72.1 ws73.1 ws74.1 ws75.1 ws76.1 ws77.1 ws78.1 ws79.1 ws80.1 ws81.1 ws82.1 ws83.1 ws84.1 ws85.1 ws86.1 ws87.1 ws88.1 ws89.1 ws90.1 ws91.1 ws92.1 ws93.1 ws94.1 ws95.1 ws96.1 ws97.1 ws98.1 ws99.1 ws100.1 ws101.1 ws102.1 ws103.1 ws104.1 ws105.1 ws106.1 ws107.1 ws108.1 ws109.1 ws110.1 ws111.1 ws112.1 ws113.1 ws114.1 ws115.1 ws116.1 ws117.1 ws118.1 ws119.1 ws120.1 ws121.1 ws122.1 ws123.1 ws124.1 ws125.1 ws126.1 ws127.1 ws128.1 ws129.1 ws130.1 ws131.1 ws132.1 ws133.1 ws134.1 ws135.1 ws136.1 ws137.1 ws138.1 ws139.1 ws140.1 ws141.1 ws142.1 ws143.1 ws144.1 ws145.1 ws146.1 ws147.1 ws148.1 ws149.1 ws150.1 ws151.1 ws152.1 ws153.1 ws154.1 ws155.1 ws156.1 ws157.1 ws158.1 ws159.1 ws160.1 ws161.1 ws162.1 ws163.1 ws164.1 ws165.1 ws166.1 ws167.1 ws168.1 ws169.1 ws170.1 ws171.1 ws172.1 ws173.1 ws174.1 ws175.1 ws176.1 ws177.1 ws178.1 ws179.1 ws180.1 ws181.1 ws182.1 ws183.1 ws184.1 ws185.1 ws186.1 ws187.1 ws188.1 ws189.1 ws190.1 ws191.1 ws192.1 ws193.1 ws194.1 ws195.1 ws196.1 ws197.1 ws198.1 ws199.1 ws200.1 ws201.1 ws202.1 ws203.1 ws204.1 ws205.1 ws206.1 ws207.1 ws208.1 ws209.1 ws210.1 ws211.1 ws212.1 ws213.1 ws214.1 ws215.1 ws216.1 ws217.1 ws218.1 ws219.1 ws220.1 ws221.1 ws222.1 ws223.1 ws224.1 ws225.1 ws226.1 ws227.1 ws228.1 | length 4106.8
  Top Layer w0.5: C18.1@32.85,51 ws18.1@35.384,51 ; C16.1@32.85,81 ws16.1@35.384,81 ; C8.1@32.85,201 ws8.1@35.384,201 ; C3.1@32.85,276 ws3.1@35.384,276 ; p1.1@32.9,308.3 32.9,306.05 C1.1@32.85,306 C4.1@32.85,261 ; C2.1@32.95,291.1 ws2.1@35.484,291.1 ; C1.1@32.95,306.1 ws1.1@35.484,306.1 35.484,306.384 37.4,308.3 42.462,308.3 46.485,312.324 51.369,312.324 52.2,311.493 52.2,306.1 ws20.1@50.484,306.1 52.038,306.1 52.251,306.314 52.251,307.291 53.26,308.3 57.462,308.3 61.485,312.324 66.369,312.324 66.984,311.709 66.984,306.1 65.283,306.1 ws39.1@65.384,306 ; ws19.1@35.384,36 C19.1@32.85,36 C17.1@32.85,66 ; ws17.1@35.384,66 C17.1@32.85,66 ; ws15.1@35.384,96 C15.1@32.85,96 ; ws14.1@35.384,111 C14.1@32.85,111 ; ws13.1@35.384,126 C13.1@32.85,126 ; ws12.1@35.384,141 C12.1@32.85,141 ; ws11.1@35.384,156 C11.1@32.85,156 ; ws10.1@35.384,171 C10.1@32.85,171 ; ws9.1@35.384,186 C9.1@32.85,186 ; ws7.1@35.384,216 C7.1@32.85,216 ; ws6.1@35.384,231 C6.1@32.85,231 ; ws5.1@35.384,246 C5.1@32.85,246 ; ws4.1@35.384,261 C4.1@32.85,261 ; C37.1@47.85,51 ws37.1@50.384,51 ; C36.1@47.85,66 ws36.1@50.384,66 ; C35.1@47.85,81 ws35.1@50.384,81 ; C34.1@47.85,96 ws34.1@50.384,96 ; C32.1@47.85,126 ws32.1@50.384,126 ; C31.1@47.85,141 ws31.1@50.384,141 ; C30.1@47.85,156 ws30.1@50.384,156 ; C29.1@47.85,171 ws29.1@50.384,171 ; C28.1@47.85,186 ws28.1@50.434,186 ; C27.1@47.85,201 ws27.1@50.384,201 ; C25.1@47.85,231 ws25.1@50.384,231 ; C24.1@47.85,246 ws24.1@50.384,246 ; C23.1@47.85,261 ws23.1@50.384,261 ; C22.1@47.85,276 ws22.1@50.384,276 ; C38.1@47.95,36.1 C38.1@47.85,36 C33.1@47.85,111 ; ws33.1@50.384,111 C33.1@47.85,111 ; ws21.1@50.384,291 C21.1@47.85,291 ; ws20.1@50.384,306 C20.1@47.85,306 C21.1@47.85,291 ; ws26.1@50.434,216 C26.1@47.85,216 ; C56.1@62.85,51 ws56.1@65.384,51 ; C55.1@62.85,66 ws55.1@65.384,66 ; C54.1@62.85,81 ws54.1@65.384,81 ; C53.1@62.85,96 ws53.1@65.384,96 ; C52.1@62.85,111 ws52.1@65.384,111 ; C51.1@62.85,126 ws51.1@65.384,126 ; C50.1@62.85,141 ws50.1@65.384,141 ; C49.1@62.85,156 ws49.1@65.384,156 ; C48.1@62.85,171 ws48.1@65.384,171 ; C47.1@62.85,186 ws47.1@65.384,186 ; C46.1@62.85,201 ws46.1@65.384,201 ; C44.1@62.85,231 ws44.1@65.384,231 ; C43.1@62.85,246 ws43.1@65.384,246 ; C42.1@62.85,261 ws42.1@65.384,261 ; C41.1@62.85,276 ws41.1@65.384,276 ; C40.1@62.85,291 ws40.1@65.384,291 ; ws57.1@65.384,36 C57.1@62.85,36 C45.1@62.85,216 ; ws45.1@65.384,216 C45.1@62.85,216 ; ws76.1@80.384,36 C76.1@77.85,36 C75.1@77.85,51 ; ws75.1@80.384,51 C75.1@77.85,51 ; ws74.1@80.384,66 C74.1@77.85,66 ; ws73.1@80.384,81 C73.1@77.85,81 ; ws72.1@80.384,96 C72.1@77.85,96 ; ws71.1@80.384,111 C71.1@77.85,111 ; ws70.1@80.384,126 C70.1@77.85,126 ; ws69.1@80.384,141 C69.1@77.85,141 ; ws68.1@80.384,156 C68.1@77.85,156 ; ws67.1@80.384,171 C67.1@77.85,171 ; ws66.1@80.384,186 C66.1@77.85,186 ; ws65.1@80.384,201 C65.1@77.85,201 ; ws64.1@80.384,216 C64.1@77.85,216 ; ws63.1@80.384,231 C63.1@77.85,231 ; ws62.1@80.384,246 C62.1@77.85,246 ; ws61.1@80.384,261 C61.1@77.85,261 ; ws59.1@80.384,291 C59.1@77.85,291 ; ws58.1@80.384,306 C58.1@77.85,306 C59.1@77.85,291 ; ws58.1@80.484,306.1 80.584,306 82,306 82,306.1 ; C88.1@92.85,141 ws88.1@95.384,141 ; 95,186 C85.1@92.85,186 ; ws95.1@95.384,36 C95.1@92.85,36 C94.1@92.85,51 ; ws94.1@95.384,51 C94.1@92.85,51 ; ws93.1@95.384,66 C93.1@92.85,66 ; ws92.1@95.384,81 C92.1@92.85,81 ; ws91.1@95.384,96 C91.1@92.85,96 ; ws90.1@95.384,111 C90.1@92.85,111 ; ws89.1@95.384,126 C89.1@92.85,126 ; ws87.1@95.384,156 C87.1@92.85,156 ; ws86.1@95.384,171 C86.1@92.85,171 ; ws84.1@95.384,201 C84.1@92.85,201 ; ws83.1@95.384,216 C83.1@92.85,216 ; ws82.1@95.384,231 C82.1@92.85,231 ; ws81.1@95.384,246 C81.1@92.85,246 ; ws80.1@95.384,261.201 95.384,261 C80.1@92.85,261 ; ws79.1@95.384,276 C79.1@92.85,276 ; ws78.1@95.384,291 C78.1@92.85,291 ; C112.1@107.85,66 ws112.1@110.384,66 ; C107.1@107.85,141 ws107.1@110.384,141 ; C100.1@107.85,246 ws100.1@110.384,246 ; ws114.1@110.384,36 C114.1@107.85,36 C113.1@107.85,51 ; ws113.1@110.384,51 C113.1@107.85,51 ; ws111.1@110.384,81 C111.1@107.85,81 ; ws110.1@110.384,96 C110.1@107.85,96 ; ws109.1@110.384,111 C109.1@107.85,111 ; ws108.1@110.384,126 C108.1@107.85,126 ; ws106.1@110.384,156 C106.1@107.85,156 ; ws105.1@110.384,171 C105.1@107.85,171 ; ws103.1@110.384,201 C103.1@107.85,201 ; ws102.1@110.384,216 C102.1@107.85,216 ; ws101.1@110.384,231 C101.1@107.85,231 ; ws99.1@110.384,261 C99.1@107.85,261 ; ws98.1@110.384,276 C98.1@107.85,276 ; ws97.1@110.384,291 C97.1@107.85,291 ; ws96.1@110.384,306 C96.1@107.85,306 C97.1@107.85,291 ; ws96.1@110.484,306.1 112,306.1 ; 111,186 C104.1@107.85,186 ; C132.1@122.85,51 ws132.1@125.384,51 ; C131.1@122.85,66 ws131.1@125.384,66 ; C130.1@122.85,81 ws130.1@125.384,81 ; C128.1@122.85,111 ws128.1@125.384,111 ; C126.1@122.85,141 ws126.1@125.384,141 ; C125.1@122.85,156 ws125.1@125.384,156 ; C124.1@122.85,171 ws124.1@125.384,171 ; C123.1@122.85,186 ws123.1@125.384,186 ; C122.1@122.85,201 125,201 ; C121.1@122.85,216 ws121.1@125.384,216 ; C120.1@122.85,231 ws120.1@125.384,231 ; C119.1@122.85,246 ws119.1@125.384,246 ; C118.1@122.85,261 ws118.1@125.384,261 ; C116.1@122.85,291 ws116.1@125.384,291 ; ws133.1@125.384,36 C133.1@122.85,36 C129.1@122.85,96 ; ws129.1@125.384,96 C129.1@122.85,96 ; ws127.1@125.384,126 C127.1@122.85,126 ; ws117.1@125.384,276 C117.1@122.85,276 ; ws115.1@125.384,306 C115.1@122.85,306 C117.1@122.85,276 ; ws115.1@125.484,306.1 127,306.1 ; C150.1@137.85,66.1 C149.1@137.85,81 ; C148.1@137.85,96.1 C147.1@137.85,111 ; C145.1@137.85,141 ws145.1@140.384,141 ; C143.1@137.85,171 ws143.1@140.384,171 ; C138.1@137.85,246 ws138.1@140.384,246 ; C136.1@137.85,276 ws136.1@140.384,276 ; C150.1@137.95,66.1 C150.1@137.85,66 ; 140,126 C146.1@137.85,126 ; ws152.1@140.384,36 C152.1@137.85,36 C151.1@137.85,51 ; ws151.1@140.384,51 C151.1@137.85,51 ; ws150.1@140.384,66 C150.1@137.85,66 ; ws149.1@140.384,81 C149.1@137.85,81 ; ws148.1@140.384,96 C148.1@137.85,96 C149.1@137.85,81 ; ws147.1@140.384,111 C147.1@137.85,111 ; ws144.1@140.384,156 C144.1@137.85,156 ; ws142.1@140.384,186 C142.1@137.85,186 ; ws141.1@140.384,201 ws141.1@140.484,201.1 ; ws140.1@140.384,216 C140.1@137.85,216 ; ws139.1@140.384,231 C139.1@137.85,231 ; ws137.1@140.384,261 C137.1@137.85,261 ; ws135.1@140.384,291 C135.1@137.85,291 ; ws134.1@140.384,306 C134.1@137.85,306 C135.1@137.85,291 ; ws134.1@140.484,306.1 140.584,306 142,306 142,306.1 ; C170.1@152.85,51 ws170.1@155.384,51 ; C169.1@152.85,66 ws169.1@155.384,66 ; C168.1@152.85,81 ws168.1@155.384,81 ; C167.1@152.85,96.1 C165.1@152.85,126 ; C166.1@152.85,111 ws166.1@155.384,111 ; C164.1@152.85,141 ws164.1@155.384,141 ; C162.1@152.85,171 156,171 ; C161.1@152.85,186 ws161.1@155.384,186 ; C160.1@152.85,201 ws160.1@155.384,201 ; C159.1@152.85,216 ws159.1@155.384,216 ; C158.1@152.85,231 ws158.1@155.384,231 ; C157.1@152.85,246 ws157.1@155.384,246 ; C156.1@152.85,261.1 C153.1@152.85,306 ws153.1@155.384,306 ; C155.1@152.85,276 ws155.1@155.384,276 ; C154.1@152.85,291 ws154.1@155.384,291 ; C167.1@152.95,96.1 C167.1@152.85,96 ; C163.1@152.95,156.1 ws163.1@155.484,156.1 ; C156.1@152.95,261.1 C156.1@152.85,261 ; ws171.1@155.384,36 C171.1@152.85,36 C167.1@152.85,96 ; ws167.1@155.384,96 C167.1@152.85,96 ; ws165.1@155.384,126 C165.1@152.85,126 ; ws156.1@155.384,261 C156.1@152.85,261 ; ws153.1@155.484,306.1 157,306.1 ; ws190.1@170.384,36 C190.1@167.85,36 C189.1@167.85,51 ; ws189.1@170.384,51 C189.1@167.85,51 ; ws188.1@170.384,66 C188.1@167.85,66 ; ws187.1@170.384,81 C187.1@167.85,81 ; ws186.1@170.384,96 C186.1@167.85,96 ; ws185.1@170.384,111 C185.1@167.85,111 ; ws183.1@170.384,141 C183.1@167.85,141 ; ws182.1@170.384,156 C182.1@167.85,156 ; ws181.1@170.384,171 C181.1@167.85,171 ; ws180.1@170.384,186 C180.1@167.85,186 ; ws178.1@170.384,216 C178.1@167.85,216 ; ws177.1@170.384,231 C177.1@167.85,231 ; ws176.1@170.384,246 C176.1@167.85,246 ; ws175.1@170.384,261 C175.1@167.85,261 ; ws174.1@170.384,276 C174.1@167.85,276 ; ws173.1@170.384,291 C173.1@167.85,291 ; ws172.1@170.384,306 C172.1@167.85,306 C173.1@167.85,291 ; ws172.1@170.484,306.1 171.984,306.1 ; 171,126 C184.1@167.85,126 ; 171,201 C179.1@167.85,201 ; C208.1@182.85,51 ws208.1@185.384,51 ; C207.1@182.85,66 ws207.1@185.384,66 ; C205.1@182.85,96 ws205.1@185.384,96 ; C203.1@182.85,126 ws203.1@185.384,126 ; C202.1@182.85,141 ws202.1@185.384,141 ; C200.1@182.85,171 ws200.1@185.384,171 ; C198.1@182.85,201 ws198.1@185.384,201 ; C196.1@182.85,231 ws196.1@185.384,231 ; C195.1@182.85,246 ws195.1@185.384,246 ; C193.1@182.85,276 ws193.1@185.384,276 ; 185,186 C199.1@182.85,186 ; ws209.1@185.384,36 C209.1@182.85,36 C206.1@182.85,81 ; ws206.1@185.384,81 C206.1@182.85,81 ; ws204.1@185.384,111 C204.1@182.85,111 ; ws201.1@185.384,156 C201.1@182.85,156 ; ws197.1@185.384,216 C197.1@182.85,216 ; ws194.1@185.384,261 C194.1@182.85,261 ; ws192.1@185.384,291 C192.1@182.85,291 ; ws191.1@185.384,306 C191.1@182.85,306 C192.1@182.85,291 ; ws191.1@185.484,306.1 187,306.1 ; C227.1@197.85,51 ws227.1@200.384,51 ; C226.1@197.85,66 200.384,66 ws226.1@200.484,66.1 ; C224.1@197.85,96 ws224.1@200.384,96 ; C222.1@197.85,126 ws222.1@200.384,126 ; C221.1@197.85,141 ws221.1@200.384,141 ; C220.1@197.85,156 ws220.1@200.384,156 ; C219.1@197.85,171 201,171 ; C217.1@197.85,201 ws217.1@200.384,201 ; C215.1@197.85,231 ws215.1@200.384,231 ; C214.1@197.85,246 ws214.1@200.384,246 ; C212.1@197.85,276 ws212.1@200.384,276 ; ws228.1@200.384,36 C228.1@197.85,36 C225.1@197.85,81 ; ws225.1@200.384,81 C225.1@197.85,81 ; ws223.1@200.384,111 C223.1@197.85,111 ; ws218.1@200.384,186 C218.1@197.85,186 ; ws216.1@200.384,216 C216.1@197.85,216 ; ws213.1@200.384,261 C213.1@197.85,261 ; ws211.1@200.384,291 C211.1@197.85,291 ; ws210.1@200.384,306 C210.1@197.85,306 C211.1@197.85,291 ; ws210.1@200.484,306.1 200.584,306 202,306 202,308.3 ; p3.2@207.4,307.76 206.14,307.76 205.6,308.3 202,308.3 ; C17.1@32.85,66 C15.1@32.85,96 ; C15.1@32.85,96 C14.1@32.85,111 ; C14.1@32.85,111 C13.1@32.85,126 ; C13.1@32.85,126 C12.1@32.85,141 ; C12.1@32.85,141 C11.1@32.85,156 ; C11.1@32.85,156 C10.1@32.85,171 ; C10.1@32.85,171 C9.1@32.85,186 ; C9.1@32.85,186 C7.1@32.85,216 ; C7.1@32.85,216 C6.1@32.85,231 ; C6.1@32.85,231 C5.1@32.85,246 ; C5.1@32.85,246 C4.1@32.85,261 ; C33.1@47.85,111 C26.1@47.85,216 ; C26.1@47.85,216 C21.1@47.85,291 ; C45.1@62.85,216 C39.1@62.85,306 ws39.1@65.384,306 ; ws39.1@65.384,306 66.937,306 67.251,306.314 67.251,307.291 67.867,307.906 71.906,307.906 76.523,312.523 78.785,312.523 78.984,312.324 81.369,312.324 82,311.692 82,306.1 ; C75.1@77.85,51 C74.1@77.85,66 ; C74.1@77.85,66 C73.1@77.85,81 ; C73.1@77.85,81 C72.1@77.85,96 ; C72.1@77.85,96 C71.1@77.85,111 ; C71.1@77.85,111 C70.1@77.85,126 ; C70.1@77.85,126 C69.1@77.85,141 ; C69.1@77.85,141 C68.1@77.85,156 ; C68.1@77.85,156 C67.1@77.85,171 ; C67.1@77.85,171 C66.1@77.85,186 ; C66.1@77.85,186 C65.1@77.85,201 ; C65.1@77.85,201 C64.1@77.85,216 ; C64.1@77.85,216 C63.1@77.85,231 ; C63.1@77.85,231 C62.1@77.85,246 ; C62.1@77.85,246 C61.1@77.85,261 ; C61.1@77.85,261 C59.1@77.85,291 ; 82,306.1 82.038,306.1 82.251,306.314 82.251,307.291 82.866,307.906 86.906,307.906 91.324,312.324 96.369,312.324 97,311.692 97,306 ; C94.1@92.85,51 C93.1@92.85,66 ; C93.1@92.85,66 C92.1@92.85,81 ; C92.1@92.85,81 C91.1@92.85,96 ; C91.1@92.85,96 C90.1@92.85,111 ; C90.1@92.85,111 C89.1@92.85,126 ; C89.1@92.85,126 C87.1@92.85,156 ; C87.1@92.85,156 C86.1@92.85,171 ; C86.1@92.85,171 C85.1@92.85,186 ; C85.1@92.85,186 C84.1@92.85,201 ; C84.1@92.85,201 C83.1@92.85,216 ; C83.1@92.85,216 C82.1@92.85,231 ; C82.1@92.85,231 C81.1@92.85,246 ; C81.1@92.85,246 C80.1@92.85,261 ; C80.1@92.85,261 C79.1@92.85,276 ; C79.1@92.85,276 C78.1@92.85,291 ; C78.1@92.85,291 C77.1@92.85,306 95.384,306 97,306 ; 97,306 97.251,306.251 97.251,307.291 97.96,308 102,308 106.324,312.324 111.369,312.324 112,311.693 112,306.1 ; C113.1@107.85,51 C111.1@107.85,81 ; C111.1@107.85,81 C110.1@107.85,96 ; C110.1@107.85,96 C109.1@107.85,111 ; C109.1@107.85,111 C108.1@107.85,126 ; C108.1@107.85,126 C106.1@107.85,156 ; C106.1@107.85,156 C105.1@107.85,171 ; C105.1@107.85,171 C104.1@107.85,186 ; C104.1@107.85,186 C103.1@107.85,201 ; C103.1@107.85,201 C102.1@107.85,216 ; C102.1@107.85,216 C101.1@107.85,231 ; C101.1@107.85,231 C99.1@107.85,261 ; C99.1@107.85,261 C98.1@107.85,276 ; C98.1@107.85,276 C97.1@107.85,291 ; 112,306.1 112.038,306.1 112.251,306.314 112.251,307.291 112.867,307.906 116.906,307.906 121.324,312.324 126.369,312.324 127,311.692 127,306.1 ; C129.1@122.85,96 C127.1@122.85,126 ; C127.1@122.85,126 C117.1@122.85,276 ; 127,306.1 127.038,306.1 127.251,306.314 127.251,307.291 127.866,307.906 131.906,307.906 136.324,312.324 141.369,312.324 142,311.692 142,306.1 ; C151.1@137.85,51 C150.1@137.85,66 ; C147.1@137.85,111 C146.1@137.85,126 ; C146.1@137.85,126 C144.1@137.85,156 ; C144.1@137.85,156 C142.1@137.85,186 ; C142.1@137.85,186 C140.1@137.85,216 ; C140.1@137.85,216 C139.1@137.85,231 ; C139.1@137.85,231 C137.1@137.85,261 ; C137.1@137.85,261 C135.1@137.85,291 ; 142,306.1 142.038,306.1 142.251,306.314 142.251,307.291 142.866,307.906 146.906,307.906 151.324,312.324 156.369,312.324 157,311.692 157,306.1 ; C165.1@152.85,126 C156.1@152.85,261 ; 157,306.1 157.038,306.1 157.251,306.314 157.251,307.291 157.867,307.906 161.906,307.906 166.324,312.324 171.369,312.324 171.984,311.709 171.984,306.1 ; C189.1@167.85,51 C188.1@167.85,66 ; C188.1@167.85,66 C187.1@167.85,81 ; C187.1@167.85,81 C186.1@167.85,96 ; C186.1@167.85,96 C185.1@167.85,111 ; C185.1@167.85,111 C184.1@167.85,126 ; C184.1@167.85,126 C183.1@167.85,141 ; C183.1@167.85,141 C182.1@167.85,156 ; C182.1@167.85,156 C181.1@167.85,171 ; C181.1@167.85,171 C180.1@167.85,186 ; C180.1@167.85,186 C179.1@167.85,201 ; C179.1@167.85,201 C178.1@167.85,216 ; C178.1@167.85,216 C177.1@167.85,231 ; C177.1@167.85,231 C176.1@167.85,246 ; C176.1@167.85,246 C175.1@167.85,261 ; C175.1@167.85,261 C174.1@167.85,276 ; C174.1@167.85,276 C173.1@167.85,291 ; 171.984,306.1 172.038,306.1 172.251,306.314 172.251,307.291 172.866,307.906 176.906,307.906 181.324,312.324 186.369,312.324 187,311.693 187,306.1 ; C206.1@182.85,81 C204.1@182.85,111 ; C204.1@182.85,111 C201.1@182.85,156 ; C201.1@182.85,156 C199.1@182.85,186 ; C199.1@182.85,186 C197.1@182.85,216 ; C197.1@182.85,216 C194.1@182.85,261 ; C194.1@182.85,261 C192.1@182.85,291 ; 187,306.1 187.038,306.1 187.251,306.314 187.251,307.291 187.867,307.906 191.906,307.906 196.324,312.324 201.369,312.324 202,311.693 202,308.3 ; C225.1@197.85,81 C223.1@197.85,111 ; C223.1@197.85,111 C218.1@197.85,186 ; C218.1@197.85,186 C216.1@197.85,216 ; C216.1@197.85,216 C213.1@197.85,261 ; C213.1@197.85,261 C211.1@197.85,291
pads on no net: C1.0 C2.0 C3.0 C4.0 C5.0 C6.0 C7.0 C8.0 C9.0 C10.0 C11.0 C12.0 C13.0 C14.0 C15.0 C16.0 C17.0 C18.0 C19.0 C20.0 C21.0 C22.0 C23.0 C24.0 C25.0 C26.0 C27.0 C28.0 C29.0 C30.0 C31.0 C32.0 C33.0 C34.0 C35.0 C36.0 C37.0 C38.0 C39.0 C40.0 C41.0 C42.0 C43.0 C44.0 C45.0 C46.0 C47.0 C48.0 C49.0 C50.0 C51.0 C52.0 C53.0 C54.0 C55.0 C56.0 C57.0 C58.0 C59.0 C60.0 C61.0 C62.0 C63.0 C64.0 C65.0 C66.0 C67.0 C68.0 C69.0 C70.0 C71.0 C72.0 C73.0 C74.0 C75.0 C76.0 C77.0 C78.0 C79.0 C80.0 C81.0 C82.0 C83.0 C84.0 C85.0 C86.0 C87.0 C88.0 C89.0 C90.0 C91.0 C92.0 C93.0 C94.0 C95.0 C96.0 C97.0 C98.0 C99.0 C100.0 C101.0 C102.0 C103.0 C104.0 C105.0 C106.0 C107.0 C108.0 C109.0 C110.0 C111.0 C112.0 C113.0 C114.0 C115.0 C116.0 C117.0 C118.0 C119.0 C120.0 C121.0 C122.0 C123.0 C124.0 C125.0 C126.0 C127.0 C128.0 C129.0 C130.0 C131.0 C132.0 C133.0 C134.0 C135.0 C136.0 C137.0 C138.0 C139.0 C140.0 C141.0 C142.0 C143.0 C144.0 C145.0 C146.0 C147.0 C148.0 C149.0 C150.0 C151.0 C152.0 C153.0 C154.0 C155.0 C156.0 C157.0 C158.0 C159.0 C160.0 C161.0 C162.0 C163.0 C164.0 C165.0 C166.0 C167.0 C168.0 C169.0 C170.0 C171.0 C172.0 C173.0 C174.0 C175.0 C176.0 C177.0 C178.0 C179.0 C180.0 C181.0 C182.0 C183.0 C184.0 C185.0 C186.0 C187.0 C188.0 C189.0 C190.0 C191.0 C192.0 C193.0 C194.0 C195.0 C196.0 C197.0 C198.0 C199.0 C200.0 C201.0 C202.0 C203.0 C204.0 C205.0 C206.0 C207.0 C208.0 C209.0 C210.0 C211.0 C212.0 C213.0 C214.0 C215.0 C216.0 C217.0 C218.0 C219.0 C220.0 C221.0 C222.0 C223.0 C224.0 C225.0 C226.0 C227.0 C228.0
copper on no net: | length 940.4
  Top Layer w0.254: 25,310 25,315 209,315 210,315 210,310 210,30 25,30 25,310.384

## Polygon pours and split planes (outlines as drawn)
GND on Top Layer "Mechanical 15-No Net" (solid, pour order 7): 30,315 210,315 210,30 30,30 30,315